# Altium PCB PCB2.PcbDoc
Units mm, origin at the board's own origin, x right, y up, seen from the top; angles counter-clockwise.
Board outline 36 x 54.6 mm, 2 copper layers (Top Layer, Bottom Layer); 25 components, 25 nets, 114 pads, 44 vias.
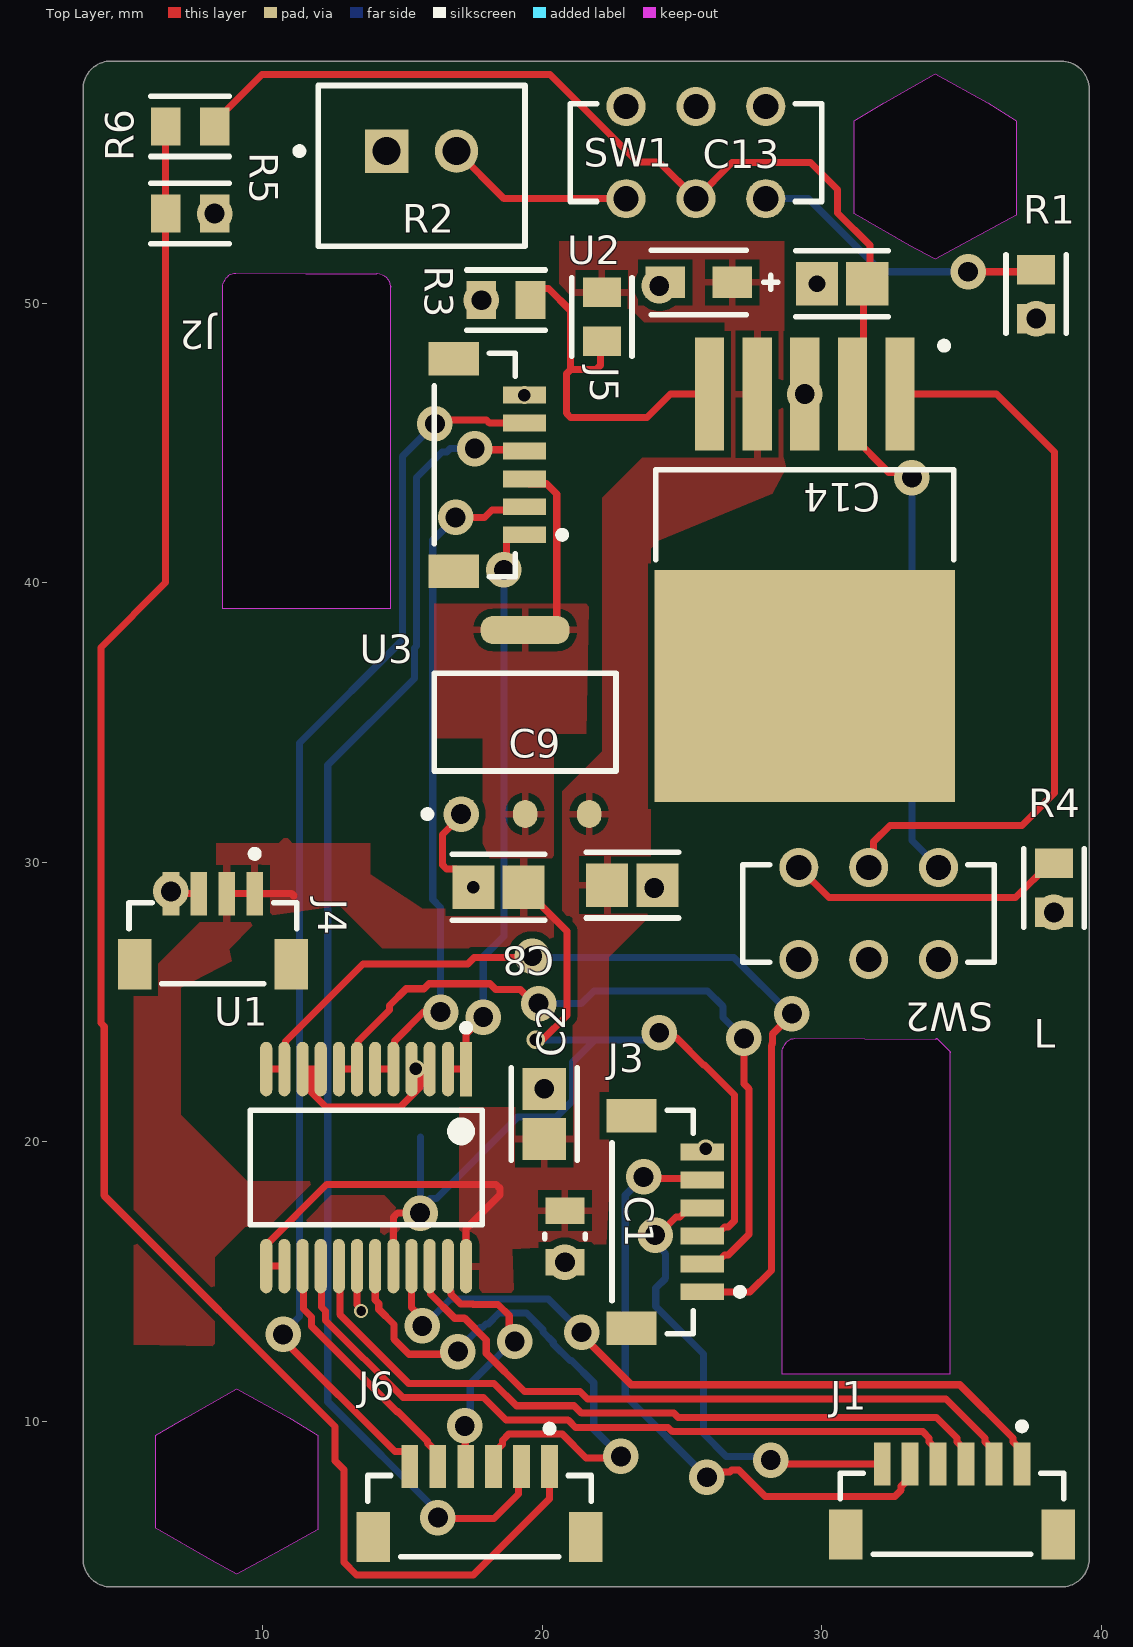
[diagram p0: Top Layer view]
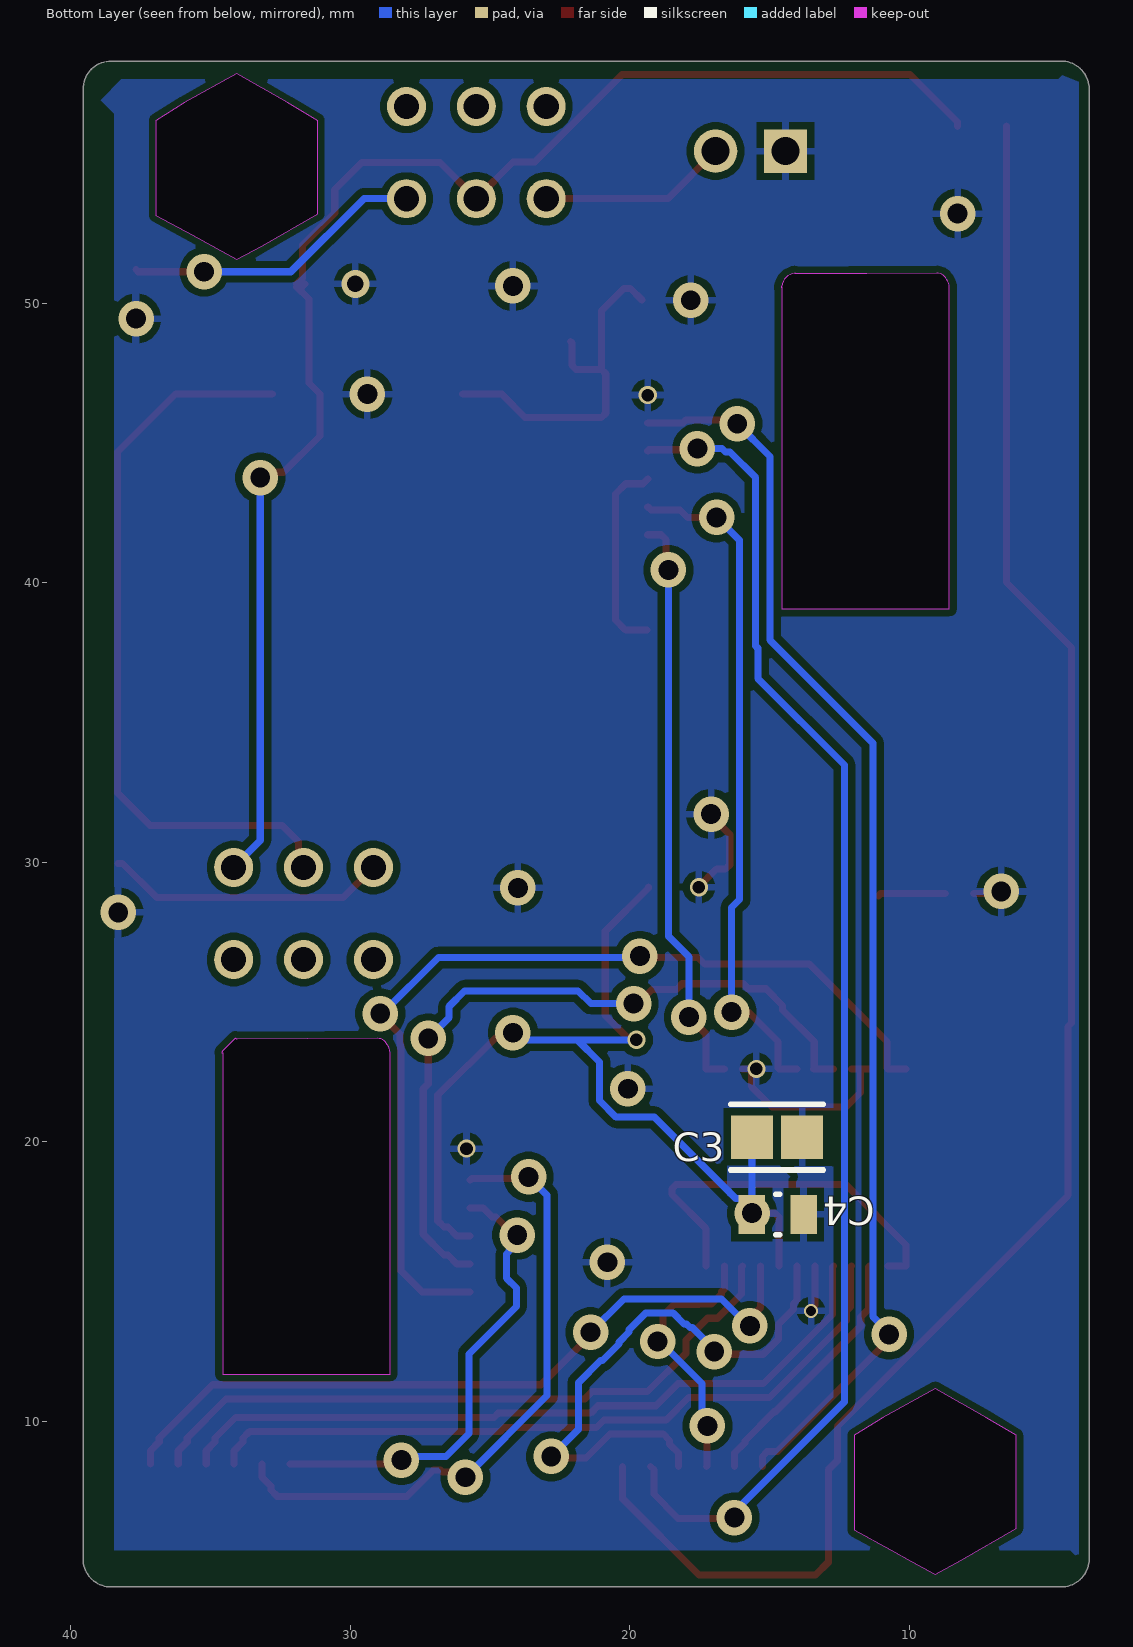
[diagram p1: Bottom Layer view, seen from below]
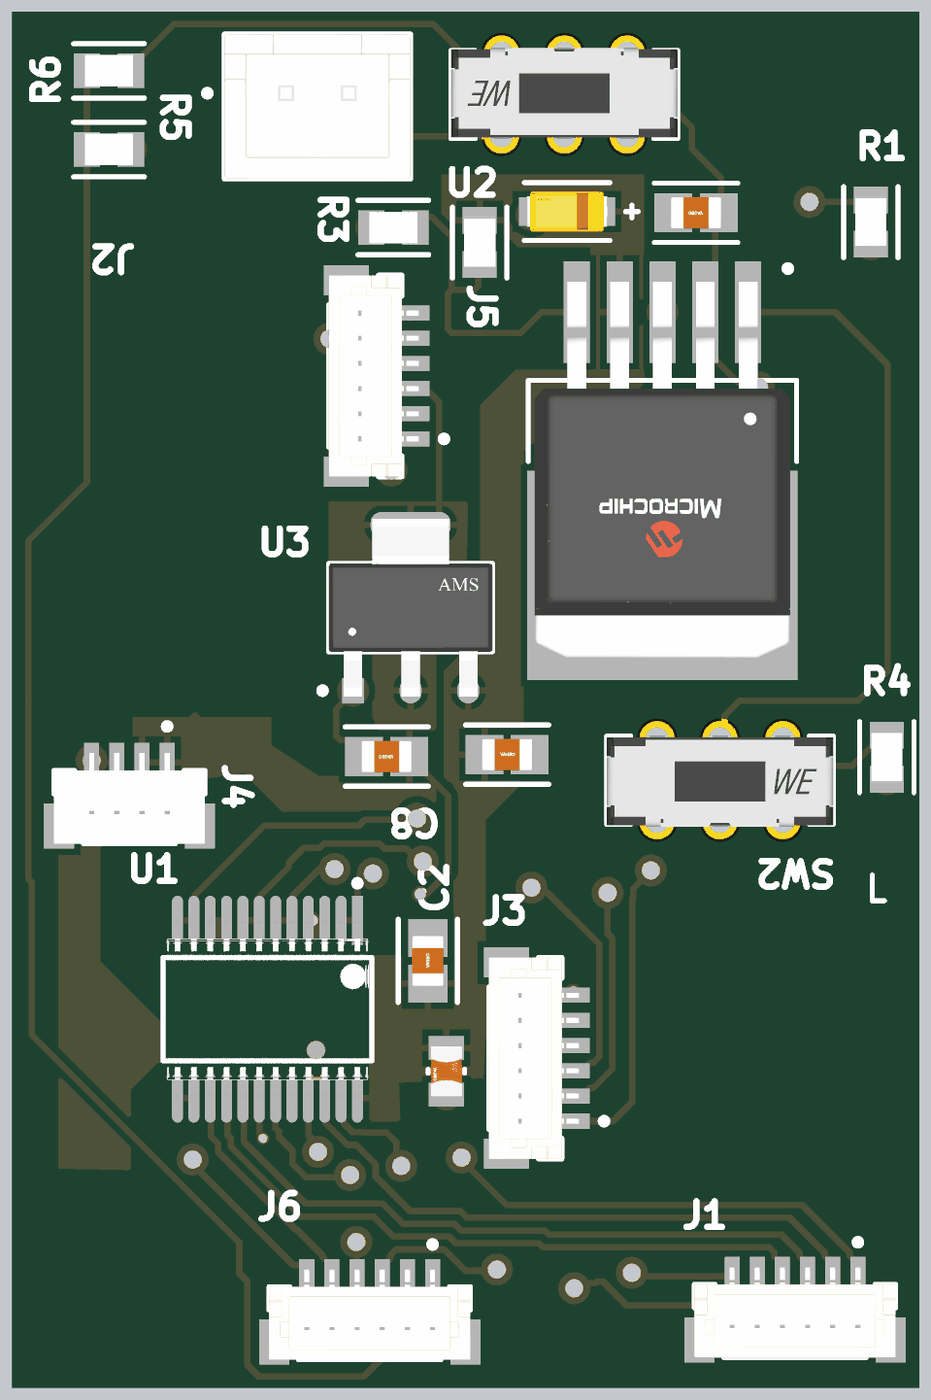
[diagram p2: 3D render of the assembled board from above, using the file's embedded part models]

## Layer stack, top to bottom
Top Solder: solder mask 0.0102, Solder Resist, Dk 3.5
Top Layer: signal copper 0.0356
Dielectric 1: dielectric 0.32, FR-4, Dk 4.8
Bottom Layer: signal copper 0.0356
Bottom Solder: solder mask 0.0102, Solder Resist, Dk 3.5

## Board outline
3.562,5.07 ccw(c4.562,5.07) 4.562,4.07 38.562,4.07 ccw(c38.562,5.07) 39.562,5.07 39.562,57.67 ccw(c38.562,57.67) 38.562,58.67 4.562,58.67 ccw(c4.562,57.67) 3.562,57.67
cut-out: 8.56,50.571 cw(c9.031,50.565) 8.658,50.853 cw(c9.018,50.68) 9.019,51.079 ccw(c19.876,1700.881) 14.035,51.054 ccw(c14.036,51.141) 14.097,51.079 cw(c14.028,50.546) 14.562,50.615 cw(c14.519,50.572) 14.58,50.571 14.554,50.571 14.554,39.065 8.56,39.065
cut-out: 28.575,23.19 cw(c29.046,23.183) 28.673,23.472 cw(c29.034,23.298) 29.032,23.698 ccw(c39.891,1673.717) 34.051,23.673 ccw(c34.051,23.759) 34.112,23.698 34.577,23.234 cw(c34.534,23.19) 34.595,23.19 34.569,23.19 34.569,11.684 28.575,11.684
cut-out: 6.169,9.493 7.235,10.128 9.064,11.169 10.944,10.128 11.96,9.493 11.96,6.114 10.664,5.403 9.884,4.975 9.064,4.525 8.15,5.022 6.169,6.165
cut-out: 31.166,56.54 32.233,57.175 34.061,58.217 35.941,57.175 36.957,56.54 36.957,53.162 35.662,52.451 34.061,51.572 33.147,52.07 31.166,53.213

## Design rules (kind name [scope] priority, off if disabled: settings)
Clearance [All] p1: gap=0.254 ignorepadtopadclearanceinfootprint=FALSE except(0.2: Arc-SMDPad Track-SMDPad SMDPad-SMDPad)
MinimumSolderMaskSliver [All] p1: minsoldermaskwidth=0.2
PolygonConnect [All] p1: connectstyle=Relief reliefconductorwidth=0.254 reliefentries=4 polygonreliefangle="90 Angle" airgapwidth=0.254
RoutingVias [All] p1: holewidth=0.711 width=1.27 viastyle="Through Hole" minholewidth=0.2 minwidth=0.35 maxholewidth=0.711 maxwidth=1.27
SolderMaskExpansion [All] p1: expansion=0.102 istentingtop=FALSE
SupplyNets "Schematic Supply Nets_2" [InNet('3V3')] p1: voltage=0.000
SupplyNets "Schematic Supply Nets_1" [InNet('GND')] p2: voltage=0.000
SupplyNets "Schematic Supply Nets" [InNet('6v')] p3: voltage=0.000
Width [All] p1: maxlimit=0.254 minlimit=0.254 preferedwidth=0.254
29 further rules are at their usual default settings.

## Components (designator, comment, footprint, x,y, rotation, side; value= is the part's Value field where it differs from the comment)
C1 "0.1 nF" FP-CC0805-0_85-MFG 20.803,16.612 r270 top value="100 nF"
C2 "10 uf" FP-CC0805-0_2-1_45-IPC_A 20.066,20.994 r90 top
C3 "0.1 nF" FP-CC0805-0_85-MFG 14.707,17.399 r180 bottom value="100 nF"
C4 "10 uf" FP-CC0805-0_2-1_45-IPC_A 14.732,20.168 r180 bottom
C8 "10 uf" FP-CC0805-0_2-1_45-IPC_A 18.429,29.108 r180 top
C9 "10 uf" FP-CC0805-0_2-1_45-IPC_A 23.216,29.185 r0 top
C13 "10uF" FP-T491A105K016AT-MFG 25.597,50.749 r0 top
C14 "10 uf" FP-CC0805-0_2-1_45-IPC_A 30.722,50.698 r180 top
J1 "BM06B-SRSS-TBT(LF)(SN)" FP-BM06B-SRSS-TBT_LF_SN-MFG 34.656,6.694 r180 top
J2 "B2B-XH-A(LF)(SN)" FP-B2B-XH-A_LF_SN-MFG 15.677,54.923 r0 top
J3 "BM06B-SRSS-TBT(LF)(SN)" FP-BM06B-SRSS-TBT_LF_SN-MFG 23.94,17.13 r90 top
J4 "BM04B-SRSS-TBT(LF)(SN)" FP-BM04B-SRSS-TBT_LF_SN-MFG 8.204,27.102 r180 top
J5 "BM06B-SRSS-TBT(LF)(SN)" FP-BM06B-SRSS-TBT_LF_SN-MFG 17.58,44.22 r90 top
J6 "BM06B-SRSS-TBT(LF)(SN)" FP-BM06B-SRSS-TBT_LF_SN-MFG 17.753,6.607 r180 top
R1 "10kohm" FP-CR0805-IPC_B 37.668,50.331 r90 top
R2 "1.2kohm" FP-CR0805-IPC_B 22.123,49.518 r90 top
R3 "330ohm" FP-CR0805-IPC_B 18.694,50.114 r0 top
R4 "10kohm" FP-CR0805-IPC_B 38.303,29.083 r90 top
R5 "300k" FP-CR0805-IPC_B 7.391,56.337 r0 top
R6 "300k" FP-CR0805-IPC_B 7.391,53.213 r180 top
SW1 "battery power" 452404020202 25.491,55.396 r180 top
SW2 "MicEn" 452404020202 31.674,28.169 r0 top
U1 "motor driver" FP-SSOP24-P-300-0_65A-IPC_A 13.691,19.075 r270 top
U2 "MIC29302WU-TR" FP-C04-012-MFG 29.388,39.218 r180 top
U3 "AMS1117-3.3" FP-AMS1117-IPC_C 19.38,35.02 r90 top

## Footprints (in the part's own frame and the unit in brackets; to place one, negate y for a bottom-side part, rotate by r counter-clockwise, add the part's x,y. Pads: shape width x height; smd on the part's side, far side on the other; paste and mask are expansions set on the pad)
452404020202 [mm] "THT Mini Slide Switch, body 9x3.5mm"
  round 1.4 hole 0.9: 1(2.5,1.65) 2(0,1.65) 3(-2.5,1.65) 4(2.5,-1.65) 5(0,-1.65) 6(-2.5,-1.65)
  silkscreen extent -4.5,-1.75 4.5,1.75, body extent -4.5,-1.85 4.5,1.75, height 5.55
FP-AMS1117-IPC_C [mm]
  rect 1.004x0.872 smd paste+0 mask+0: 1(-3.295,2.29)
  rrect100% 1.004x0.872 smd paste+0 mask+0: 2(-3.295,0) 3(-3.295,-2.29)
  rrect87% 1.004x3.182 smd paste+0 mask+0: 4(3.295,0)
  silkscreen extent -3.42,-3.25 1.75,3.62, body extent -3.9,-3.35 3.9,3.35, height 0.25
FP-B2B-XH-A_LF_SN-MFG [mm]
  rect 1.55x1.55 hole 1 paste-2539.97 mask+0: 1(-1.25,0.525)
  round 1.55 hole 1 paste-2539.97 mask+0: 2(1.25,0.525)
  silkscreen extent -4.5,-2.88 3.7,2.88, body extent -3.8,-2.98 3.8,2.98, height 0.25
FP-BM04B-SRSS-TBT_LF_SN-MFG [mm]
  rect 0.6x1.55 smd paste+0 mask+0: 1(-1.5,-1.775) 2(-0.5,-1.775) 3(0.5,-1.775) 4(1.5,-1.775)
  rect 1.2x1.8 smd paste+0 mask+0: 5(-2.8,0.75) 6(2.8,0.75)
  silkscreen extent -3,-3.32 3,1.45, body extent -3.5,-2.65 3.5,1.75, height 0.25
FP-BM06B-SRSS-TBT_LF_SN-MFG [mm]
  rect 0.6x1.55 smd paste+0 mask+0: 1(-2.5,-1.775) 2(-1.5,-1.775) 3(-0.5,-1.775) 4(0.5,-1.775) 5(1.5,-1.775) 6(2.5,-1.775)
  rect 1.2x1.8 smd paste+0 mask+0: 7(-3.8,0.75) 8(3.8,0.75)
  silkscreen extent -4,-3.25 4,1.45, body extent -4.5,-2.65 4.5,1.75, height 0.25
FP-C04-012-MFG [mil]
  rect 41x159 smd paste+0 mask+0: 1(-134,-296.75) 2(-67,-296.75) 3(0,-296.75) 4(67,-296.75) 5(134,-296.75)
  rect 423x327 smd paste+0 mask+0: 6(0,114.75)
  silkscreen extent -210,-370 210,-64, body extent -215,-380 215,282, height 10
FP-CC0805-0_2-1_45-IPC_A [mm]
  rect 1.505x1.556 smd paste+0 mask+0: 1(-0.901,0) 2(0.901,0)
  silkscreen extent -1.65,-1.18 1.65,1.18, body extent -2.15,-1.28 2.15,1.28, height 0.25
FP-CC0805-0_85-MFG [mm]
  rect 0.95x1.4 smd paste+0 mask+0: 1(-0.925,0) 2(0.925,0)
  silkscreen extent -0.08,-0.72 0.08,0.72, body extent -1.6,-1.05 1.6,1.05, height 0.25
FP-CR0805-IPC_B [mm]
  rect 1.058x1.362 smd paste+0 mask+0: 1(-0.877,0) 2(0.877,0)
  silkscreen extent -1.41,-1.08 1.41,1.08, body extent -1.66,-0.93 1.66,0.93, height 0.25
FP-SSOP24-P-300-0_65A-IPC_A [mm]
  rect 1.954x0.432 smd paste+0 mask+0: 1(-3.525,3.575)
  rrect100% 1.954x0.432 smd paste+0 mask+0: 2(-3.525,2.925) 3(-3.525,2.275) 4(-3.525,1.625) 5(-3.525,0.975) 6(-3.525,0.325) 7(-3.525,-0.325) 8(-3.525,-0.975) 9(-3.525,-1.625) 10(-3.525,-2.275) 11(-3.525,-2.925) 12(-3.525,-3.575) 13(3.525,-3.575) 14(3.525,-2.925) 15(3.525,-2.275) 16(3.525,-1.625) 17(3.525,-0.975) 18(3.525,-0.325) 19(3.525,0.325) 20(3.525,0.975) 21(3.525,1.625) 22(3.525,2.275) 23(3.525,2.925) 24(3.525,3.575)
  silkscreen extent -5.13,-4.15 2.05,4.15, body extent -5,-4.65 5,4.65, height 0.25
FP-T491A105K016AT-MFG [mm]
  rect 1.42x1.13 smd paste+0 mask+0: 1(-1.2,0) 2(1.2,0)
  silkscreen extent -1.7,-1.15 2.83,1.15, body extent -2.03,-1.02 2.03,1.02, height 0.25

## Part data
C1 C3: library part CMP-2100-03606-3, "CAP CER 0.1UF 50V X7R 0805", Capacitance="100 nF", Manufacturer=Yageo, Manufacturer Part Number=CC0805KRX7R9BB104, Package=CC0805-0.85, Temperature="-30°C to +85°C", Temperature Characteristic=X7R, Temperature Range High=+85°C, Temperature Range Low=-30°C, Tolerance=0.1, Voltage Rating="50 V", Automotive=No, Category=Cap, ComponentLink2Description=Datasheet, ComponentLink2URL=http://www.yageo.com/documents/recent/UPY-GPHC_Y5V_6.3V-to-50V_8.pdf, Device Class L1="Passive Components", Device Class L2=Capacitors, Device Class L3="Ceramic Capacitors", Digikey Description="CAP CER 0.1UF 50V X7R 0805", Footprint Url=http://www.yageo.com/exep/pages/download/literatures/UPY-C_GEN_24.pdf, Height=0.95mm, Ipc Land Pattern Name=CAPC200125X85, Lead Free=Yes, Material=Ceramic, Mouser Description="Multilayer Ceramic Capacitors MLCC - SMD/SMT 100nF 50V X7R 10%", Octopart=https://octopart.com/cc0805krx7r9bb104-yageo-192993, RoHS=TRUE
C2 C4 C8 C9 C14: library part CMP-1036-04922-3, "CAP CER 10UF 10V X5R 0805", Capacitance=10uF, Case Code (Imperial)=0805, Case Code (Metric)=2012, Dielectric=X5R, Max Operating Temperature=85°C, Min Operating Temperature=-55°C, Package Quantity=1, Resistor Type=Ceramic, Tolerance=10%, Voltage=10V, Case/Package=0805, Construction=Flat, Depth=1.25mm, Dissipation Factor=15%, Halogen Free="Halogen Free", Height=0.85mm, Lead Free="Lead Free", Length=2mm, Mount="Surface Mount", Number of Pins=2, Packaging="Tape and Reel", Radiation Hardening=No, RoHS Compliant=Yes, Series=CC, Termination=SMD/SMT, Voltage Rating=10V, Voltage Rating (DC)=10V, Width=0.049inch
C13: library part CMP-2000-07186-2, "CAP TANT 1UF 10% 16V 1206", Capacitance=1uF, Case Code (Imperial)=1206, Case Code (Metric)=3216, Dielectric Material=Tantalum, ESR (Equivalent Series Resistance)=10R, Leakage Current=500nA, Max Operating Temperature=125°C, Min Operating Temperature=-55°C, Package Quantity=1, Ripple Current=87mA, Tolerance=20%, Voltage=16V, Case/Package=1206, Depth=1.6mm, Dissipation Factor=4%, Features="General Purpose", Height=1.6mm, Height - Seated (Max)=0.071inch, Lead Free="Lead Free", Length=3.2mm, Life (Hours)=2000Hour, Mount="Surface Mount", Number of Pins=2, Packaging="Tape and Reel", Polarity=Polar, REACH SVHC="No SVHC", Termination=SMD/SMT, Voltage Rating=16V, Voltage Rating (DC)=16V, Width=1.6mm
J1 J3 J5 J6: library part CMP-17439-000255-1, "CONN HEADER SMD 6POS 1MM", Color=Natural, Contact Resistance=20mR, Current Rating=1A, Flammability Rating="UL94 V-0", Insulation Resistance=100MR, Max Operating Temperature=85°C, Max Voltage Rating (AC)=50V, Min Operating Temperature=-25°C, Package Quantity=1, Connector Type=Header, Contact Finish - Mating=TIN, Contact Material="Copper Alloy", Contact Plating=Tin, Contact Shape=Square, Contact Type="Male Pin", Depth=3.6mm, Fastening Type=Pull, Gender=Male, Housing Color=Natural, Housing Material=Polyamide, Insulation Color=Natural, Insulation Material=Nylon, Lead Free="Lead Free", Length=8mm, Mated Stacking Heights=4.9mm, Material=Polyamide, Max Current Rating=1A, Max Voltage Rating (DC)=50V, Mount="Surface Mount", Number of Positions=6, Number of Rows=1, Orientation=Straight, Packaging="Tape and Reel", Pitch=1mm, Series=SR, Termination=Solder, Voltage Rating=50V
J2: library part CMP-2000-05888-3, "CONN HEADER VERT 2POS 2.5MM", Color=Natural, Contact Resistance=20mR, Current Rating=3A, Housing Color=White, Insulation Resistance=1GR, Max Operating Temperature=85°C, Max Voltage Rating (AC)=250V, Min Operating Temperature=-25°C, Connector Type="Male Pin", Contact Material=Brass, Contact Plating=Tin, Contact Type="Male Pin", Depth=5.75mm, Fastening Type=Detent, Housing Material=Polyamide, Lead Free="Lead Free", Lead Pitch=2.5mm, Length=7.4mm, Max Current Rating=3A, Max Voltage Rating (DC)=250V, Mount="Through Hole", Number Of Contacts=2, Number of Positions=2, Number of Rows=1, Orientation=Straight, Packaging=Bulk, Pitch=2.5mm, REACH SVHC="No SVHC", Series=XH, Termination=Solder, Voltage Rating=250V, Voltage Rating (AC)=250V, Wire/Cable Gauge=22AWG
J4: library part CMP-17439-000370-1, "CONN HEADER SMD 4POS 1MM", Color=Natural, Flammability Rating="UL94 V-0", Package Quantity=1, Voltage Rating=50V, Connector Type=Header, Contact Finish - Mating=TIN, Contact Material="Copper Alloy", Contact Plating=Tin, Contact Shape=Square, Contact Type="Male Pin", Fastening Type=Pull, Insulation Color=Natural, Insulation Material=Nylon, Lead Free="Lead Free", Mated Stacking Heights=4.9mm, Mount="Surface Mount", Number of Positions=4, Number of Rows=1, Packaging="Cut Tape", Pitch=0.039inch, Series=SR, Termination=Solder
R1 R4 R5 R6: library part CMP-07231-003873-1, "Thick Film Chip Resistors 0805 10kΩ 0.125W 5% 200ppm/°C", Case Code (Imperial)=0805, Case Code (Metric)=2012, Max Operating Temperature=155°C, Max Power Dissipation=125mW, Min Operating Temperature=-55°C, Package Quantity=1, Resistance=10kR, Temperature Coefficient=200ppm/°C, Tolerance=5%, Voltage Rating=150V, Voltage Rating (DC)=100V, Case/Package=0805, Composition="Thick Film", Contact Plating=Tin, Depth=1.25mm, Features="Moisture Resistant", Height=0.5mm, Length=2mm, Military Standard=Not, Mount="Surface Mount", Number of Pins=2, Number of Terminations=2, Packaging="Tape and Reel", Power Rating=125mW, Radiation Hardening=No, REACH SVHC="No SVHC", Termination=SMD/SMT, Thickness=508um, Width=1.25mm
R2: library part CMP-07231-005482-1, "Thick Film Chip Resistors 0805 1kΩ 0.125W 1% 100ppm/°C", Case Code (Imperial)=0805, Case Code (Metric)=2012, Max Operating Temperature=155°C, Max Power Dissipation=125mW, Min Operating Temperature=-55°C, Package Quantity=1, Resistance=1kR, Temperature Coefficient=100ppm/°C, Tolerance=1%, Voltage Rating=150V, Case/Package=0805, Composition="Thick Film", Contact Plating=Tin, Depth=1.25mm, Features="Moisture Resistant", Height=0.5mm, Length=2mm, Mount="Surface Mount", Number of Pins=2, Number of Terminations=2, Packaging="Tape and Reel", Power Rating=125mW, Radiation Hardening=No, REACH SVHC="No SVHC", Termination=SMD/SMT, Thickness=508um, Voltage Rating (DC)=150V, Width=1.25mm
R3: library part CMP-1013-00454-2, "Thick Film Chip Resistors 0805 330Ω 0.125W 1% 100ppm/°C", Case Code (Imperial)=0805, Case Code (Metric)=2012, Max Operating Temperature=155°C, Min Operating Temperature=-55°C, Package Quantity=5000, Power Rating=125mW, Resistance=330R, Temperature Coefficient=100ppm/°C, Tolerance=1%, Voltage Rating=150V, Case/Package=0805, Composition="Thick Film", Contact Plating=Tin, Depth=1.25mm, Height=0.5mm, Length=2mm, Military Standard=Not, Mount="Surface Mount", Packaging="Tape and Reel", Radiation Hardening=No, REACH SVHC="No SVHC", Termination=SMD/SMT, Thickness=508um, Voltage Rating (DC)=150V, Width=1.25mm
SW1 SW2: library part CMP-03913-99472345-1, "452404020202 Slide Switch, Dpdt, 0.3A, 6Vdc, Tht Rohs Compliant: Yes", Current Rating=300mA, Insulation Resistance=100MΩ, Max Operating Temperature=85°C, Min Operating Temperature=-40°C, Voltage Rating=6V, Contact Plating=Silver, NexarPartId=99472345, Packaging=Bulk
U1: library part CMP-2100-03693-4, "IC MOTOR DRIVER 2.7V-5.5V 24SSOP", Case/Package=SSOP, Max Operating Temperature=85°C, Max Supply Voltage=5.5V, Min Operating Temperature=-20°C, Min Supply Voltage=2.7V, Operating Supply Voltage=3V, Output Current=1A, Package Quantity=1, Interface=Parallel, Logic Function="AND GATE", Mount="Surface Mount", Number of Outputs=2, Number of Pins=24, Packaging="Tape and Reel", Series=-
U2: library part CMP-06324-000007-1, "IC REG LINEAR POS ADJ 3A TO263-5", Dropout Voltage=370mV, Manufacturer=Microchip, Max Junction Temp=+125°C, Max Supply Voltage=26V, Min Supply Voltage=2.25V, Nominal Supply Current=10-37mA, Output Current=3A, Output Voltage=3.3-12V, Package=C04-012, Temperature="-40°C to +125°C", Temperature Range Low=-40°C, Accuracy Percentage=1%, Automotive=No, Category=IC, ComponentLink2Description=Datasheet, ComponentLink2URL=http://ww1.microchip.com/downloads/en/DeviceDoc/MIC2915x-30x-50x-75x-High-Current-Low-Dropout-Regulators-DS20005685B.pdf, Device Class L1="Integrated Circuits (ICs)", Device Class L2="Power Management ICs", Device Class L3="Voltage Regulators - Linear", Digikey Description="IC REG LINEAR POS ADJ 3A TO263-5", Height=0.2inch, Lead Free=Yes, Manufacturer Part Number=MIC29302WU-TR, Mouser Description="LDO Voltage Regulators", Number of Outputs=1, Octopart=https://octopart.com/mic29302wu-tr-microchip-66801318, Output Type=AdjustableProgrammable, RoHS=TRUE, Standoff Height=0mm, Temperature Range High=+125°C
U3: library part CMP-209535-000001-1, "LDO Voltage Regulators 1A, 3.3V", Dropout Voltage=1.1V, Manufacturer="Advanced Monolithic Systems", Max Junction Temp=+125°C, Max Power Dissipation=1.2W, Max Supply Voltage=15V, Nominal Supply Current=5mA, Output Current=1A, Output Voltage=3.3V, Package=AMS1117, Temperature="-40°C to +125°C", Temperature Range Low=-40°C, Automotive=No, Category=IC, ComponentLink2Description=Datasheet, ComponentLink2URL=http://www.advanced-monolithic.com/pdf/ds1117.pdf, Device Class L1="Integrated Circuits (ICs)", Device Class L2="Power Management ICs", Device Class L3="Voltage Regulators - Linear", Height=1.8mm, Ipc Land Pattern Name=SOT229P700X180-4, Lead Free=Yes, Manufacturer Part Number=AMS1117-3.3, Number of Outputs=1, Octopart=https://octopart.com/ams1117-3.3-advanced+monolithic+systems-25899300, Output Type=Fixed, RoHS=TRUE, Standoff Height=0.64mm, Temperature Range High=+125°C

## Via types
v1: diameter 1.27, hole 0.711, Top Layer to Bottom Layer, tented both sides, 37 vias
v2: diameter 0.65, hole 0.45, Top Layer to Bottom Layer, tented both sides, 5 vias
v3: diameter 0.5, hole 0.35, Top Layer to Bottom Layer, tented both sides, 1 vias
v4: diameter 1, hole 0.6, Top Layer to Bottom Layer, tented both sides, 1 vias

## Nets (pads, with @x,y where several pads share a name; then routed paths per layer and width w, separated by ;. In a path a pad name is that pad's centre, name@x,y a point inside that pad or via, vN(x,y) a via of type N, cw(c..) or ccw(c..) an arc to the next point about the centre after c; other vN are vias at no path point)
3V3: C3.1 C4.1 C8.1 J3.3 J4.1 J4.2 J5.3 U1.20 U3.2 U3.4 | length 45.5
  Top Layer w0.254: J4.2 J4.1 11.027,28.877 11.1,28.804 ; U1.20 14.666,17.301 14.814,17.45 v1(15.621,17.45) ; C8.1 19.329,29.083 20.879,27.533 20.879,24.522 20.004,23.647 v2(19.761,23.647) ; J5.3 19.528,43.547 20.142,43.547 20.511,43.178 20.511,38.666 20.159,38.315 U3.4 ; v1(24.181,23.901) 24.375,23.707 24.807,23.707 25.768,22.746 25.794,22.746 26.871,21.668 26.871,17.172 26.648,16.949 26.509,16.949 26.19,16.63 J3.3
  Bottom Layer w0.254: v1(15.621,17.45) 15.633,17.45 C4.1 ; C3.1@15.684,17.45 15.684,17.676 15.98,17.972 16.206,17.972 19.113,20.879 20.487,20.879 21.082,21.474 21.082,22.848 21.881,23.647 ; v2(19.761,23.647) 23.652,23.647 23.906,23.901 v1(24.181,23.901)
6v: C1.1 C2.1 C9.1 C13.2 R2.2 U1.13 U1.14 U1.24 U2.4 U3.3 | length 14
  Top Layer w0.254: U1.14 U1.13 10.116,16.311 12.271,18.466 18.339,18.466 18.488,18.317 18.488,18.107 17.266,16.885 U1.24
7v4: J2.2 SW1.1 | length 6.8
  Top Layer w0.254: J2.2 18.629,53.746 SW1.1
AIN1: J1.1 U1.21 | length 27
  Top Layer w0.254: U1.21 15.316,14.07 15.7,13.686 v1(15.7,13.411) ; v1(21.401,13.183) 21.407,13.177 21.407,13.074 23.178,11.303 34.935,11.303 36.837,9.401 36.837,9.263 37.156,8.944 J1.1
  Bottom Layer w0.254: v1(15.7,13.411) 15.748,13.411 16.713,14.376 20.207,14.376 v1(21.401,13.183)
AIN2: J1.2 U1.22 | length 24.3
  Top Layer w0.254: U1.22 16,15.516 16,14.548 16.864,13.684 17.217,13.684 17.991,12.911 17.991,12.432 19.36,11.062 21.342,11.062 21.609,10.795 34.443,10.795 35.837,9.401 35.837,9.263 36.156,8.944 J1.2
AO1: J5.1 U1.1 U1.2 | length 20.9
  Top Layer w0.254: U1.2 U1.1 17.266,23.844 v1(17.882,24.46) ; v1(18.619,40.462) 18.707,40.55 18.707,41.547 18.88,41.72 J5.1
  Bottom Layer w0.254: v1(17.882,24.46) 17.882,26.617 18.619,27.354 v1(18.619,40.462)
AO2: J5.2 U1.5 U1.6 | length 24.5
  Top Layer w0.254: U1.6 14.341,22.601 U1.5 14.7,22.635 14.7,23.59 15.748,24.638 v1(16.358,24.638) ; v1(16.891,42.342) 17.931,42.342 18.199,42.61 19.244,42.61 J5.2
  Bottom Layer w0.254: v1(16.358,24.638) 16.358,28.387 16.074,28.671 16.074,41.525 v1(16.891,42.342)
BAT_LVL: J6.1 R5.1 R6.2 | length 65.8
  Top Layer w0.254: R5.1 R6.2 6.514,40.006 4.198,37.69 4.198,24.25 4.318,24.13 4.318,18.07 12.573,9.815 12.573,8.585 12.895,8.263 12.895,4.952 13.352,4.496 17.523,4.496 20.253,7.226 J6.1
BIN1: J1.3 U1.17 | length 26.7
  Top Layer w0.254: U1.17 12.75,15.516 12.75,13.819 15.215,11.354 18.266,11.354 19.066,10.554 21.132,10.554 21.399,10.287 24.705,10.287 24.859,10.133 34.105,10.133 34.837,9.401 34.837,9.263 35.156,8.944 J1.3
BIN2: J1.4 U1.16 | length 26.4
  Top Layer w0.254: U1.16 12.1,15.516 12.1,14.082 12.242,13.94 12.242,13.608 15.004,10.846 17.896,10.846 18.696,10.046 20.921,10.046 21.188,9.779 24.495,9.779 24.649,9.625 33.613,9.625 33.837,9.401 33.837,9.263 34.156,8.944 J1.4
BO1: J3.1 U1.11 U1.12 | length 34.1
  Top Layer w0.254: U1.12 U1.11 10.8,22.635 10.8,23.59 13.575,26.365 17.33,26.365 17.559,26.594 v1@19.634,26.594 ; J3.1 27.431,14.63 28.194,15.392 28.194,23.385 28.195,23.448 28.208,23.461 28.208,23.508 28.226,23.525 28.226,23.85 28.926,24.55 v1(28.926,24.586)
  Bottom Layer w0.254: v1@19.634,26.594 26.848,26.594 28.856,24.586 v1(28.926,24.586)
  other v1: 19.634,26.645
BO2: J3.2 U1.7 U1.8 | length 27.1
  Top Layer w0.254: U1.8 U1.7 13.419,22.601 13.4,22.62 13.4,23.59 14.529,24.719 14.529,24.881 15.124,25.476 15.759,25.476 15.937,25.654 18.125,25.654 18.328,25.451 19.206,25.451 19.714,24.943 v1(19.863,24.943) ; J3.2 26.19,15.63 26.509,15.949 26.648,15.949 27.388,16.689 27.388,21.895 27.21,22.074 v1(27.21,23.697)
  Bottom Layer w0.254: v1(19.863,24.943) 21.391,24.943 21.849,25.4 25.908,25.4 26.462,24.846 26.462,24.445 v1(27.21,23.697)
CH1_LEFTB: J1.6 J3.4 | length 17.1
  Top Layer w0.254: v1(24.028,16.662) 24.134,16.662 24.782,17.311 24.921,17.311 25.24,17.63 J3.4 ; v1(28.169,8.609) 28.309,8.469 J1.6
  Bottom Layer w0.254: v1(24.028,16.662) 24.028,16.387 24.345,16.071 24.345,16.05 24.409,15.985 24.409,15.118 24.056,14.764 24.056,14.102 25.758,12.4 25.758,9.555 26.575,8.738 28.04,8.738 v1(28.169,8.609)
CH1_RIGHTA: J5.4 J6.2 | length 48.5
  Top Layer w0.254: v1@16.261,6.558 16.295,6.524 18.272,6.524 19.139,7.391 19.139,8.268 J6.2 ; v1(17.577,44.806) 17.62,44.763 19.312,44.763 J5.4
  Bottom Layer w0.254: v1@16.256,6.807 16.205,6.807 12.319,10.693 12.319,33.477 15.418,36.576 15.418,37.661 15.494,37.737 15.494,43.764 16.408,44.679 16.575,44.679 16.702,44.806 v1(17.577,44.806)
  other v1: 16.256,6.553
CH2_LEFTB: J1.5 J3.5 | length 23
  Top Layer w0.254: v1(23.622,18.745) 23.68,18.687 25.657,18.687 J3.5 J3.5@25.708,18.637 ; v1(25.882,7.995) 26.076,8.189 26.705,8.189 26.771,8.256 27.025,8.256 27.968,7.313 32.613,7.313 32.837,7.536 32.837,7.675 33.156,7.994 J1.5
  Bottom Layer w0.254: v1(23.622,18.745) 22.962,18.085 22.962,10.915 v1(25.882,7.995)
CH2_RIGHTA: J5.5 J6.6 | length 45.1
  Top Layer w0.254: v1(10.719,13.106) 10.719,12.916 14.721,8.914 15.08,8.914 15.253,8.741 J6.6 ; v1(16.154,45.695) 16.307,45.695 16.434,45.822 17.998,45.822 18.099,45.72 J5.5
  Bottom Layer w0.254: v1@10.541,12.979 11.303,13.741 11.303,34.265 14.986,37.948 14.986,44.526 v1(16.154,45.695)
GND: C1.2 C2.2 C3.2 C4.2 C8.2 C9.2 C13.1 C14.2 J2.1 J3.6 J4.3 J4.4 J5.6 R1.1 R3.1 R4.1 R6.1 U1.3 U1.4 U1.9 U1.10 U1.18 U2.3 U3.1 | length 13.4
  Top Layer w0.254: J4.4 J4.3 ; U1.10 11.741,22.601 ; U1.9 11.741,22.601 ; U1.18 13.366,14.168 13.513,14.021 v3(13.513,13.948) ; U1.3 15.641,22.601 15.641,21.971 14.913,21.243 12.26,21.243 11.741,21.762 11.741,22.601 ; v1(17.09,31.725) 17.09,31.659 16.422,30.99 16.422,29.91 16.572,29.76 16.903,29.76 17.528,29.134 v2(17.528,29.108) ; R1.1@37.363,49.493 37.363,49.454 v1(37.668,49.454)
  other v1: 20.803,15.687 20.066,21.895 38.303,28.206 6.706,28.956 24.003,29.083 29.388,46.755 17.817,50.114 24.181,50.622 8.268,53.213
  other v2: 25.842,19.757 15.469,22.606 19.355,46.72
  other v4: 29.821,50.698
MC_STDBY: J6.3 U1.19 | length 20.9
  Top Layer w0.254: U1.19 14.016,14.338 14.144,14.209 14.144,14.007 14.684,13.467 14.684,12.935 15.223,12.395 16.88,12.395 v1(16.975,12.49) ; J6.3 18.253,8.857 18.572,9.176 18.572,9.315 18.795,9.538 20.711,9.538 21.562,8.687 22.758,8.687 v1(22.809,8.738)
  Bottom Layer w0.254: v1(16.975,12.49) 16.975,12.566 17.764,13.355 17.85,13.355 17.977,13.482 18.06,13.482 18.446,13.868 19.428,13.868 20.023,13.273 20.023,13.189 20.385,12.827 20.385,12.762 20.98,12.167 21.046,12.167 21.837,11.375 21.837,9.71 v1(22.809,8.738)
NetC14_1: C14.1 R5.2 SW1.2 SW2.1 U2.2 | length 53
  Top Layer w0.254: R5.2 8.268,56.489 9.971,58.191 20.269,58.191 23.398,55.063 24.175,55.063 SW1.2 26.786,55.042 29.591,55.042 30.556,54.077 30.556,53.238 31.716,52.079 31.716,50.903 C14.1@31.92,50.698 ; C14.1 31.725,50.596 31.92,50.596 31.483,50.159 31.483,47.149 U2.2 31.09,45.256 32.387,43.959 33.029,43.959 v1(33.223,43.764)
  Bottom Layer w0.254: v1(33.223,43.764) 33.223,30.786 34.174,29.835 SW2.1
NetR1_2: R1.2 SW1.3 | length 10.8
  Top Layer w0.254: v1(35.23,51.13) 37.591,51.13 R1.2
  Bottom Layer w0.254: SW1.3 29.515,53.746 32.131,51.13 v1(35.23,51.13)
NetR2_1: R2.1 R3.2 U2.5 | length 13.2
  Top Layer w0.254: R3.2 19.571,50.132 19.973,50.534 20.214,50.534 21.011,49.737 21.011,47.637 ; R2.1 22.073,48.59 22.073,47.786 21.924,47.637 21.011,47.637 ; U2.5 24.58,46.755 23.746,45.922 21.007,45.922 20.858,46.07 20.858,47.485 21.011,47.637
NetR4_2: R4.2 SW2.3 | length 10.1
  Top Layer w0.254: SW2.3 30.255,28.738 36.929,28.738 38.151,29.96 R4.2
NetSW2_2: SW2.2 U2.1 | length 26.8
  Top Layer w0.254: SW2.2 31.852,29.996 31.852,30.734 32.436,31.318 37.16,31.318 38.329,32.487 38.329,44.679 36.252,46.755 U2.1
PWMA: J6.4 U1.23 | length 9.7
  Top Layer w0.254: U1.23 16.616,14.741 16.723,14.634 16.723,14.544 17.074,14.192 17.513,14.192 17.525,14.18 18.415,14.18 18.812,13.783 18.812,13.047 v1(19.007,12.852) ; v1(17.221,9.83) 17.237,9.814 17.237,8.398 J6.4
  Bottom Layer w0.254: v1(17.221,9.83) 17.416,10.024 17.416,11.345 18.923,12.852 v1(19.007,12.852)
PWMB: J6.5 U1.15 | length 9.2
  Top Layer w0.254: U1.15 11.45,15.516 11.45,14.014 11.734,13.73 11.734,13.398 14.794,10.338 14.835,10.338 15.88,9.292 15.88,9.23 16.253,8.857 J6.5
pads on no net: J1.7 J1.8 J3.7 J3.8 J4.5 J4.6 J5.7 J5.8 J6.7 J6.8 SW1.4 SW1.5 SW1.6 SW2.4 SW2.5 SW2.6 U2.6

## Polygon pours and split planes (outlines as drawn)
3V3 on Top Layer "NONET_L-01_P-001" (solid, pour order 1): 10.815,30.923 5.375,25.483 5.375,15.581 5.375,15.174 5.375,12.969 5.375,12.742 8.27,12.685 8.27,13.244 8.27,13.93 8.27,15.865 9.358,16.952 10.125,16.952 10.252,17.079 10.861,17.079 14.189,17.079 14.189,15.301 14.722,14.768 14.925,14.971 14.925,17.486 13.833,18.578 9.439,18.578 7.051,20.965 7.051,25.507 8.89,26.467 8.786,26.887 9.904,28.023 10.125,28.226 10.732,28.865 10.975,28.865 12.233,28.865 12.487,29.119
6v on Top Layer "NONET_L-01_P-001" (solid, pour order 2): 28.651,44.628 28.651,52.222 20.603,52.222 20.603,50.67 21.463,49.809 23.165,49.809 23.647,49.327 24.46,49.327 26.518,49.327 26.518,44.882 26.772,44.628 26.619,44.475 23.571,44.475 22.141,43.046 22.141,33.978 20.701,32.537 20.701,28.092 20.98,28.092 21.082,27.991 21.082,21.234 17.018,21.234 17.018,17.17 17.018,16.586 17.018,14.605 18.974,14.605 18.923,16.154 22.276,16.332 22.377,18.009 22.377,26.594 23.876,28.092 23.876,41.224 24.15,41.498 28.221,43.185 28.717,44.112 28.635,44.497
3V3 on Top Layer "NONET_L-01_P-001" (solid, pour order 0): 16.129,39.243 21.666,39.243 21.567,34.608 20.396,34.595 20.396,27.407 20.396,26.873 18.364,26.924 14.275,26.924 12.751,28.448 8.577,27.848 8.558,27.91 8.331,27.889 8.34,28.448 8.331,29.058 8.331,30.683 9.042,30.683 9.601,30.683 13.843,30.683 13.843,29.566 15.723,28.346 16.942,28.346 18.364,28.346 18.364,29.589 17.856,30.683 17.856,34.442 16.104,34.442 16.129,34.468
GND on Bottom Layer "NONET_L-01_P-001" (solid, pour order 4): 4.521,58.166 4.674,58.014 38.202,58.014 38.938,57.277 38.456,56.794 38.456,5.385 4.242,5.385 3.937,5.08 3.937,57.937
3V3 on Bottom Layer "NONET_L-01_P-001" (solid, pour order 3): 14.935,20.98 15.011,21.057 16.51,21.057 16.51,16.916 16.358,16.764 16.332,16.789 14.326,16.789 14.326,18.669 14.249,18.745 14.808,19.304 14.808,21.082

## Silkscreen, mask and mechanical layers (free items; w line width, h text height)
Top Overlay:
  text "L" at 37.584,23.368 h1.02
Mechanical 1:
  circle w0.013: c9.062,7.87 r1.5
  circle w0.013: c34.062,54.87 r1.5
  lines w0.013: 3.562,5.07 ccw(c4.562,5.07) 4.562,4.07 38.562,4.07 ccw(c38.562,5.07) 39.562,5.07 39.562,57.67 ccw(c38.562,57.67) 38.562,58.67 4.562,58.67 ccw(c4.562,57.67) 3.562,57.67 3.562,5.07 ; 6.162,6.196 9.062,4.522 11.962,6.196 11.962,9.545 9.062,11.219 6.162,9.545 6.162,6.196 ; 8.562,39.57 ccw(c9.062,39.57) 9.062,39.07 14.062,39.07 ccw(c14.062,39.57) 14.562,39.57 14.562,50.57 ccw(c14.062,50.57) 14.062,51.07 9.062,51.07 ccw(c9.062,50.57) 8.562,50.57 8.562,39.57 ; 28.562,12.17 ccw(c29.062,12.17) 29.062,11.67 34.062,11.67 ccw(c34.062,12.17) 34.562,12.17 34.562,23.17 ccw(c34.062,23.17) 34.062,23.67 29.062,23.67 ccw(c29.062,23.17) 28.562,23.17 28.562,12.17 ; 31.162,53.196 34.062,51.522 36.962,53.196 36.962,56.545 34.062,58.219 31.162,56.545 31.162,53.196